# EAGLE board actuatorboard (EAGLE 8.7.1)

Size 86.36 x 54.61 mm. Coordinates in mm from the lower left corner, seen from the top.
Copper layers (1*16): Top 0.035mm / dielectric 1.5mm / Bottom 0.035mm
Design rules "default": minimum track width 10mil, minimum drill 24mil, track to track 8mil, track to pad 8mil, pad to pad 8mil, via to via 8mil, smd to smd 8mil, copper to edge 40mil, drill to drill 8mil, minimum pad ring 10mil, minimum via ring 8mil, stop-mask expansion 4mil, vias tented up to drill 0mil, thermal gap 10mil

## Footprints (pad centres in the part's own frame; a part is rotated, then mirrored left to right if it is on the bottom)
C0805 = smd 1.3 x 1.5: 1 -0.95,0; 2 0.95,0
SOT23 = smd 1 x 1.4: 1 -0.95,-1.1; 2 0.95,-1.1; 3 0,1.1
A0R-JMP = smd 1.5 x 1.3: 1 0,1.7; 2 0,0; 3 0,-1.7
CHIPLED_0805 = smd 1.2 x 1.2: A 0,-1.05; C 0,1.05
SU_LOGO_DS = smd 1.27 x 0.635: P$1 0,0 | smd 1.27 x 0.635 bottom: P$2 0,0
39-30-?04? = drill 1.422 pad 2.54 square: 1 2.095,0 | drill 1.422 pad 2.54 octagon: 2 -2.095,0; 3 2.095,5.512; 4 -2.095,5.512 | hole 3: 0,-7.3
BEAGLEBONE_BLACK_CAPE_NO_ETH = drill 3.175: H1 14.605,3.175; H2 80.645,6.35; H3 80.645,48.26; H4 14.605,51.435 | drill 1.016: P8.1 19.685,50.165; P8.2 19.685,52.705; P8.3 22.225,50.165; P8.4 22.225,52.705; P8.5 24.765,50.165; P8.6 24.765,52.705; P8.7 27.305,50.165; P8.8 27.305,52.705; P8.9 29.845,50.165; P8.10 29.845,52.705; P8.11 32.385,50.165; P8.12 32.385,52.705; P8.13 34.925,50.165; P8.14 34.925,52.705; P8.15 37.465,50.165; P8.16 37.465,52.705; P8.17 40.005,50.165; P8.18 40.005,52.705; P8.19 42.545,50.165; P8.20 42.545,52.705; P8.21 45.085,50.165; P8.22 45.085,52.705; P8.23 47.625,50.165; P8.24 47.625,52.705; P8.25 50.165,50.165; P8.26 50.165,52.705; P8.27 52.705,50.165; P8.28 52.705,52.705; P8.29 55.245,50.165; P8.30 55.245,52.705; P8.31 57.785,50.165; P8.32 57.785,52.705; P8.33 60.325,50.165; P8.34 60.325,52.705; P8.35 62.865,50.165; P8.36 62.865,52.705; P8.37 65.405,50.165; P8.38 65.405,52.705; P8.39 67.945,50.165; P8.40 67.945,52.705; P8.41 70.485,50.165; P8.42 70.485,52.705; P8.43 73.025,50.165; P8.44 73.025,52.705; P8.45 75.565,50.165; P8.46 75.565,52.705; P9.1 19.685,1.905; P9.2 19.685,4.445; P9.3 22.225,1.905; P9.4 22.225,4.445; P9.5 24.765,1.905; P9.6 24.765,4.445; P9.7 27.305,1.905; P9.8 27.305,4.445; P9.9 29.845,1.905; P9.10 29.845,4.445; P9.11 32.385,1.905; P9.12 32.385,4.445; P9.13 34.925,1.905; P9.14 34.925,4.445; P9.15 37.465,1.905; P9.16 37.465,4.445; P9.17 40.005,1.905; P9.18 40.005,4.445; P9.19 42.545,1.905; P9.20 42.545,4.445; P9.21 45.085,1.905; P9.22 45.085,4.445; P9.23 47.625,1.905; P9.24 47.625,4.445; P9.25 50.165,1.905; P9.26 50.165,4.445; P9.27 52.705,1.905; P9.28 52.705,4.445; P9.29 55.245,1.905; P9.30 55.245,4.445; P9.31 57.785,1.905; P9.32 57.785,4.445; P9.33 60.325,1.905; P9.34 60.325,4.445; P9.35 62.865,1.905; P9.36 62.865,4.445; P9.37 65.405,1.905; P9.38 65.405,4.445; P9.39 67.945,1.905; P9.40 67.945,4.445; P9.41 70.485,1.905; P9.42 70.485,4.445; P9.43 73.025,1.905; P9.44 73.025,4.445; P9.45 75.565,1.905; P9.46 75.565,4.445
R0805 = smd 1.3 x 1.5: 1 -0.95,0; 2 0.95,0
EXBV8V = smd 0.45 x 0.7: 1 -1.2,-0.775; 2 -0.4,-0.775; 3 0.4,-0.775; 4 1.2,-0.775; 5 1.2,0.775; 6 0.4,0.775; 7 -0.4,0.775; 8 -1.2,0.775
B1,27 = smd 1.27 x 1.27: TP 0,0
SOT363-INFINION = smd 0.3 x 0.7: 1 -0.65,-0.8; 2 0,-0.8; 3 0.65,-0.8; 4 0.65,0.8; 5 0,0.8; 6 -0.65,0.8
S-PWSON-N8 = smd 0.3 x 0.5: 1 -1.2,-1.75; 2 -0.4,-1.75; 3 0.4,-1.75; 4 1.2,-1.75; 5 1.2,1.75; 6 0.4,1.75; 7 -0.4,1.75; 8 -1.2,1.75 | smd 3 x 2.2: PAD 0,0
POWERDI3333-8 = smd 0.42 x 0.7: P$1 -0.975,-1.5; P$2 -0.325,-1.5; P$3 0.325,-1.5; P$4 0.975,-1.5 | smd 0.42 x 0.54: P$5 0.975,1.58; P$6 0.325,1.58; P$7 -0.325,1.58; P$8 -0.975,1.58
SMD-1206 = smd 1.6 x 1.803: 1 -1.422,0; 2 1.422,0
SOIC-16 = smd 0.65 x 1.75: P$1 -4.445,-2.8; P$2 -3.175,-2.8; P$3 -1.905,-2.8; P$4 -0.635,-2.8; P$5 0.635,-2.8; P$6 1.905,-2.8; P$7 3.175,-2.8; P$8 4.445,-2.8; P$9 4.445,2.8; P$10 3.175,2.8; P$11 1.905,2.8; P$12 0.635,2.8; P$13 -0.635,2.8; P$14 -1.905,2.8; P$15 -3.175,2.8; P$16 -4.445,2.8
SO-18W = smd 0.762 x 1.143: 1 -5.08,-4.788; 2 -3.81,-4.788; 3 -2.54,-4.788; 4 -1.27,-4.788; 5 0,-4.788; 6 1.27,-4.788; 7 2.54,-4.788; 8 3.81,-4.788; 9 5.08,-4.788; 10 5.08,4.788; 11 3.81,4.788; 12 2.54,4.788; 13 1.27,4.788; 14 0,4.788; 15 -1.27,4.788; 16 -2.54,4.788; 17 -3.81,4.788; 18 -5.08,4.788
PQFN-32 = smd 1.2 x 1.2: 1 -3.6,3.6; 9 -3.6,-3.6; 17 3.6,-3.6; 25 3.6,3.6 | smd 1.2 x 0.5: 2 -3.6,2.4; 3 -3.6,1.6; 4 -3.6,0.8; 5 -3.6,0; 6 -3.6,-0.8; 7 -3.6,-1.6; 8 -3.6,-2.4; 18 3.6,-2.4; 19 3.6,-1.6; 20 3.6,-0.8; 21 3.6,0; 22 3.6,0.8; 23 3.6,1.6; 24 3.6,2.4 | smd 0.5 x 1.2: 10 -2.4,-3.6; 11 -1.6,-3.6; 12 -0.8,-3.6; 13 0,-3.6; 14 0.8,-3.6; 15 1.6,-3.6; 16 2.4,-3.6; 26 2.4,3.6; 27 1.6,3.6; 28 0.8,3.6; 29 0,3.6; 30 -0.8,3.6; 31 -1.6,3.6; 32 -2.4,3.6 | smd 5 x 5: PAD 0,0
1787111 = drill 1.4: 1 -19.25,4.7; 2 -19.25,2.2; 3 -15.75,4.7; 4 -15.75,2.2; 5 -12.25,4.7; 6 -12.25,2.2; 7 -8.75,4.7; 8 -8.75,2.2; 9 -5.25,4.7; 10 -5.25,2.2; 11 -1.75,4.7; 12 -1.75,2.2; 13 1.75,4.7; 14 1.75,2.2; 15 5.25,4.7; 16 5.25,2.2; 17 8.75,4.7; 18 8.75,2.2; 19 12.25,4.7; 20 12.25,2.2; 21 15.75,4.7; 22 15.75,2.2; 23 19.25,4.7; 24 19.25,2.2

## Placement (x,y rotation side)
C1  0.1u  [C0805]  18.95,46.75 0 top
C2  0.1u  [C0805]  51.39,42.72 0 top
C3  0.1u  [C0805]  46.39,42.64 0 top
D1  BAT54S  [SOT23]  21.45,40.14 0 top
D2  BAT54S  [SOT23]  32.5,36.34 0 top
JMP1  0R-JUMPA  [A0R-JMP]  35,9 0 top
LED1  Yellow  [CHIPLED_0805]  75.91,7.6 0 top
LED2  Yellow  [CHIPLED_0805]  41.76,30.1 0 top
LED3  Green  [CHIPLED_0805]  27.81,25.85 0 top
LED4  Yellow  [CHIPLED_0805]  12.74,24.85 0 top
LED5  Red  [CHIPLED_0805]  16.39,24.85 0 top
LED6  Yellow  [CHIPLED_0805]  27.39,30.5 0 top
LED7  Red  [CHIPLED_0805]  27.39,34.8 0 top
LOGO  SU_LOGO-DUMMY  [SU_LOGO_DS]  81.67,23.6 0 top
P1  39-30-04?  [39-30-?04?]  72.39,38.83 90 top
PCB1  BEAGLEBONE_BLACK_CAPENO_ETH  [BEAGLEBONE_BLACK_CAPE_NO_ETH]  0,0 0 top
R1  10K  [R0805]  14.87,44.75 0 top
R2  100K  [R0805]  14.79,34.75 0 top
R3  100K  [R0805]  14.71,30.75 0 top
R4  100K  [R0805]  21.63,29.75 0 top
R5  10K  [R0805]  21.68,34.64 0 top
R6  10K  [R0805]  17.68,18.1 0 top
R7  10K  [R0805]  28.23,40.02 0 top
R8  100K  [R0805]  35.8,38.67 0 top
R9  100K  [R0805]  21.44,23.51 0 top
R10  1K  [R0805]  52,39 0 top
R12  100K  [R0805]  20.91,12.52 0 top
R13  10K  [R0805]  52.23,35.96 0 top
R14  10K  [R0805]  21.91,7.17 0 top
R15  100K  [R0805]  36.16,34.12 0 top
R18  100K  [R0805]  14.09,21.12 0 top
R19  100K  [R0805]  27.39,19.42 0 top
RN1  100K  [EXBV8V]  75.8,25.57 0 top
RN2  10K  [EXBV8V]  63.08,9.8 90 top
RN3  10K  [EXBV8V]  68.09,30.16 180 top
RN4  100K  [EXBV8V]  47.31,37.81 180 top
RN5  10K  [EXBV8V]  49.09,32.47 0 top
RN6  100K  [EXBV8V]  32.92,30.61 180 top
RN7  10K  [EXBV8V]  35,15 90 top
RN8  100K  [EXBV8V]  23.92,47.01 180 top
TP1  PTR1B1,27  [B1,27]  21.21,16.34 0 top
TP2  PTR1B1,27  [B1,27]  28.21,47.36 0 top
TP3  PTR1B1,27  [B1,27]  12.71,15.88 0 top
U$1  BC847PN  [SOT363-INFINION]  15.06,40.4 0 top
U$2  BC847PN  [SOT363-INFINION]  30.23,45.37 0 top
U$3  TLV9002IDSGR  [S-PWSON-N8]  15.16,10.06 0 top
U$4  BC847PN  [SOT363-INFINION]  66.36,23.16 0 top
U$5  DMP3017SFG  [POWERDI3333-8]  76.15,46.29 0 top
U$6  DMP3017SFG  [POWERDI3333-8]  72.8,30.29 0 top
U$7  5A  [SMD-1206]  70.5,47.28 180 top
U$8  MMPQ3904  [SOIC-16]  60.59,42.65 0 top
U$9  MCP23008  [SO-18W]  42.63,12.41 0 top
U$10  DMP3017SFG  [POWERDI3333-8]  76.71,14 0 top
U$11  MMPQ3904  [SOIC-16]  36.1,23.62 90 top
U$12  DMP3017SFG  [POWERDI3333-8]  82.61,13.41 0 top
U$13  MCP23008  [SO-18W]  55.41,12.67 180 top
U$14  DMP3017SFG  [POWERDI3333-8]  70.81,22.72 0 top
U$15  MMPQ3904  [SOIC-16]  28.12,12.62 90 top
U$16  DMP3017SFG  [POWERDI3333-8]  41.91,46.78 0 top
U$17  MCP23008  [SO-18W]  48.83,23.83 0 top
U$18  DMP3017SFG  [POWERDI3333-8]  48.8,46.78 0 top
U$19  MC33926PNB  [PQFN-32]  59.64,22.74 180 top
U$20  DMP3017SFG  [POWERDI3333-8]  41.91,35.16 0 top
U$21  MC33926PNB  [PQFN-32]  60.36,33.36 0 top
U$22  DMP3017SFG  [POWERDI3333-8]  41.8,41.16 0 top
U$23  1787111  [1787111]  5,27 270 top
U$24  MMPQ3904  [SOIC-16]  69.35,15.02 90 top

## Library data of the parts
C1-C3 R1-R10 R12-R15 R18 R19 = rcl
D1 D2 = diode
JMP1 = jump-0r-smd
LED1-LED7 = led
LOGO = components
P1 = con-molex-mini-fit
PCB1 = e14_BeagleBoneBlack_RevB
RN1-RN8 = resistor-dil; OC_FARNELL: unknown; OC_NEWARK: unknown
TP1-TP3 = testpad
U$1 U$2 U$4 = transistor
U$3 = texas
U$5 U$6 U$10 U$12 U$14 U$16 U$18 U$20 U$22 = transistor-fet
U$7 = fuse
U$8 U$11 U$15 U$24 = on-semiconductor
U$9 U$13 U$17 = microchip
U$19 U$21 = nxp
U$23 = con-phoenix-350

## Nets
!RESET!: PCB1.P9.28 RN7.4 U$9.6 U$13.6 U$17.6
+3V3: JMP1.3 RN5.6 RN5.8 RN7.5 RN7.6 RN7.7 RN7.8 U$9.5 U$9.18 U$13.18 U$17.4 U$17.5 U$17.18 U$19.16 U$21.16
+5V: D1.1 D1.3 PCB1.P9.5 PCB1.P9.6 R2.2 R5.2 R7.2 R14.1 U$1.5 U$3.8
+12V: C2.1 C3.1 R12.2 RN1.5 RN1.6 RN1.7 RN1.8 RN4.5 RN4.6 RN4.7 RN4.8 U$6.P$1 U$6.P$2 U$6.P$3 U$7.2 U$10.P$1 U$10.P$2 U$10.P$3 U$12.P$1 U$12.P$2 U$12.P$3 U$14.P$1 U$14.P$2 U$14.P$3 U$16.P$1 U$16.P$2 U$16.P$3 U$18.P$1 U$18.P$2 U$18.P$3 U$19.4 U$19.6 U$19.11 U$19.31 U$20.P$1 U$20.P$2 U$20.P$3 U$21.4 U$21.6 U$21.11 U$21.31 U$22.P$1 U$22.P$2 U$22.P$3 U$23.21 U$23.22
GND: C1.2 JMP1.1 LED1.C LED2.C LED3.C P1.1 P1.2 PCB1.P8.1 PCB1.P8.2 PCB1.P9.1 PCB1.P9.2 PCB1.P9.43 PCB1.P9.44 PCB1.P9.45 PCB1.P9.46 R2.1 R3.1 R4.1 R9.1 R10.1 RN5.2 RN5.4 U$1.1 U$1.3 U$3.4 U$3.PAD U$4.3 U$8.P$10 U$8.P$12 U$8.P$14 U$8.P$16 U$9.4 U$9.9 U$11.P$10 U$11.P$12 U$11.P$14 U$11.P$16 U$13.4 U$13.5 U$13.9 U$15.P$10 U$15.P$12 U$15.P$14 U$15.P$16 U$17.9 U$19.3 U$19.5 U$19.7 U$19.18 U$19.19 U$19.20 U$19.22 U$19.23 U$19.24 U$19.26 U$19.PAD U$21.3 U$21.5 U$21.7 U$21.18 U$21.19 U$21.20 U$21.22 U$21.23 U$21.24 U$21.26 U$21.PAD U$23.23 U$23.24 U$24.P$10 U$24.P$12 U$24.P$14 U$24.P$16
INTERRUPT: PCB1.P9.25 RN7.3 U$9.8
N$1: D2.2 R9.2 U$4.5
N$2: C1.1 R1.1 R3.2 TP3.TP U$1.4 U$3.3 U$4.4
N$3: R4.2 R5.1 U$3.2
N$4: U$1.6 U$4.1
N$5: R6.1 U$4.2
N$6: R6.2 TP1.TP U$3.1
N$7: U$2.1 U$4.6
N$8: U$5.P$5 U$5.P$6 U$5.P$7 U$5.P$8 U$7.1
N$9: R7.1 U$2.2
N$10: D1.2 R1.2
N$11: U$6.P$5 U$6.P$6 U$6.P$7 U$6.P$8 U$23.1
N$12: D2.1 D2.3 P1.3 P1.4 R8.1 R15.2 U$5.P$1 U$5.P$2 U$5.P$3
N$13: R8.2 TP2.TP U$2.6 U$5.P$4
N$14: R13.1 U$1.2
N$15: RN1.1 U$6.P$4 U$24.P$1 U$24.P$2
N$16: RN2.1 U$13.10
N$17: RN2.8 U$24.P$15
N$18: U$17.10 U$19.2
N$19: U$17.11 U$19.1
N$20: LED1.A R14.2
N$21: LED2.A R15.1
N$22: LED3.A R12.1
N$23: U$10.P$5 U$10.P$6 U$10.P$7 U$10.P$8 U$23.3
N$24: RN1.2 U$10.P$4 U$24.P$3 U$24.P$4
N$25: RN2.7 U$24.P$13
N$26: RN2.2 U$13.11
N$27: U$12.P$5 U$12.P$6 U$12.P$7 U$12.P$8 U$23.5
N$28: RN1.3 U$12.P$4 U$24.P$5 U$24.P$6
N$29: RN2.6 U$24.P$11
N$30: RN2.3 U$13.12
N$31: U$14.P$5 U$14.P$6 U$14.P$7 U$14.P$8 U$23.7
N$32: RN1.4 U$14.P$4 U$24.P$7 U$24.P$8
N$33: RN2.5 U$24.P$9
N$34: RN2.4 U$13.13
N$35: U$17.12 U$19.10
N$37: U$16.P$5 U$16.P$6 U$16.P$7 U$16.P$8 U$23.9
N$38: RN4.1 U$8.P$1 U$8.P$2 U$16.P$4
N$39: RN3.8 U$8.P$15
N$40: RN3.1 U$13.14
N$41: U$18.P$5 U$18.P$6 U$18.P$7 U$18.P$8 U$23.11
N$42: RN4.2 U$8.P$3 U$8.P$4 U$18.P$4
N$43: RN3.7 U$8.P$13
N$44: RN3.2 U$13.15
N$45: U$20.P$5 U$20.P$6 U$20.P$7 U$20.P$8 U$23.13
N$46: RN4.3 U$8.P$5 U$8.P$6 U$20.P$4
N$47: RN3.6 U$8.P$11
N$48: RN3.3 U$13.16
N$49: U$22.P$5 U$22.P$6 U$22.P$7 U$22.P$8 U$23.15
N$50: RN4.4 U$8.P$7 U$8.P$8 U$22.P$4
N$51: RN3.5 U$8.P$9
N$52: RN3.4 U$13.17
N$53: U$9.10 U$11.P$1 U$11.P$2
N$54: U$9.11 U$11.P$3 U$11.P$4
N$55: RN6.8 U$11.P$15
N$56: U$9.12 U$11.P$5 U$11.P$6
N$57: U$9.13 U$11.P$7 U$11.P$8
N$58: U$9.14 U$15.P$1 U$15.P$2
N$59: U$9.15 U$15.P$3 U$15.P$4
N$60: U$9.16 U$15.P$5 U$15.P$6
N$61: U$9.17 U$15.P$7 U$15.P$8
N$62: RN6.7 U$11.P$13
N$63: RN6.6 U$11.P$11
N$64: RN6.5 U$11.P$9
N$65: RN8.8 U$15.P$15
N$66: RN5.1 U$17.13 U$19.21
N$67: RN5.7 U$19.8
N$68: U$17.14 U$21.2
N$69: U$17.15 U$21.1
N$70: RN8.7 U$15.P$13
N$71: RN8.6 U$15.P$11
N$72: RN8.5 U$15.P$9
N$73: U$17.16 U$21.10
N$74: RN5.3 U$17.17 U$21.21
N$75: RN5.5 U$21.8
N$76: LED4.A LED5.C R18.1
N$77: LED4.C LED5.A U$19.27 U$19.28 U$19.29 U$19.30 U$23.19
N$78: RN8.4 U$23.2
N$79: R18.2 U$19.12 U$19.13 U$19.14 U$19.15 U$23.17
N$80: LED6.A LED7.C R19.1
N$81: LED6.C LED7.A U$21.27 U$21.28 U$21.29 U$21.30 U$23.20
N$82: R19.2 U$21.12 U$21.13 U$21.14 U$21.15 U$23.18
N$83: C2.2 U$21.32
N$84: C3.2 U$19.32
N$85: RN8.3 U$23.4
N$86: RN8.2 U$23.6
N$87: RN8.1 U$23.8
N$88: RN6.4 U$23.10
N$89: RN6.3 U$23.12
N$90: RN6.2 U$23.14
N$91: RN6.1 U$23.16
N$92: JMP1.2 U$9.3 U$13.3 U$17.3
PWR_EN: PCB1.P9.27 R10.2 R13.2
SCL: PCB1.P9.24 RN7.2 U$9.1 U$13.1 U$17.1
SDA: PCB1.P9.26 RN7.1 U$9.2 U$13.2 U$17.2

## Tracks (layer width: path | path; a pad name or v marks a point on that pad's centre or on a via)
!RESET!  (4 unrouted)
+3V3  (14 unrouted)
+5V  (9 unrouted)
+12V  (45 unrouted)
GND  (72 unrouted)
INTERRUPT  (2 unrouted)
N$1  (2 unrouted)
N$2  (6 unrouted)
N$3  (2 unrouted)
N$4  (1 unrouted)
N$5  (1 unrouted)
N$6  (2 unrouted)
N$7  (1 unrouted)
N$8  (4 unrouted)
N$9  (1 unrouted)
N$10  (1 unrouted)
N$11  (4 unrouted)
N$12  (8 unrouted)
N$13  (3 unrouted)
N$14  (1 unrouted)
N$15  (3 unrouted)
N$16  (1 unrouted)
N$17  (1 unrouted)
N$18  (1 unrouted)
N$19  (1 unrouted)
N$20  (1 unrouted)
N$21  (1 unrouted)
N$22  (1 unrouted)
N$23  (4 unrouted)
N$24  (3 unrouted)
N$25  (1 unrouted)
N$26  (1 unrouted)
N$27  (4 unrouted)
N$28  (3 unrouted)
N$29  (1 unrouted)
N$30  (1 unrouted)
N$31  (4 unrouted)
N$32  (3 unrouted)
N$33  (1 unrouted)
N$34  (1 unrouted)
N$35  (1 unrouted)
N$37  (4 unrouted)
N$38  (3 unrouted)
N$39  (1 unrouted)
N$40  (1 unrouted)
N$41  (4 unrouted)
N$42  (3 unrouted)
N$43  (1 unrouted)
N$44  (1 unrouted)
N$45  (4 unrouted)
N$46  (3 unrouted)
N$47  (1 unrouted)
N$48  (1 unrouted)
N$49  (4 unrouted)
N$50  (3 unrouted)
N$51  (1 unrouted)
N$52  (1 unrouted)
N$53  (2 unrouted)
N$54  (2 unrouted)
N$55  (1 unrouted)
N$56  (2 unrouted)
N$57  (2 unrouted)
N$58  (2 unrouted)
N$59  (2 unrouted)
N$60  (2 unrouted)
N$61  (2 unrouted)
N$62  (1 unrouted)
N$63  (1 unrouted)
N$64  (1 unrouted)
N$65  (1 unrouted)
N$66  (2 unrouted)
N$67  (1 unrouted)
N$68  (1 unrouted)
N$69  (1 unrouted)
N$70  (1 unrouted)
N$71  (1 unrouted)
N$72  (1 unrouted)
N$73  (1 unrouted)
N$74  (2 unrouted)
N$75  (1 unrouted)
N$76  (2 unrouted)
N$77  (6 unrouted)
N$78  (1 unrouted)
N$79  (5 unrouted)
N$80  (2 unrouted)
N$81  (6 unrouted)
N$82  (5 unrouted)
N$83  (1 unrouted)
N$84  (1 unrouted)
N$85  (1 unrouted)
N$86  (1 unrouted)
N$87  (1 unrouted)
N$88  (1 unrouted)
N$89  (1 unrouted)
N$90  (1 unrouted)
N$91  (1 unrouted)
N$92  (3 unrouted)
PWR_EN  (2 unrouted)
SCL  (4 unrouted)
SDA  (4 unrouted)